# EAGLE board mainBoard(ok)2 (EAGLE 9.5.2)
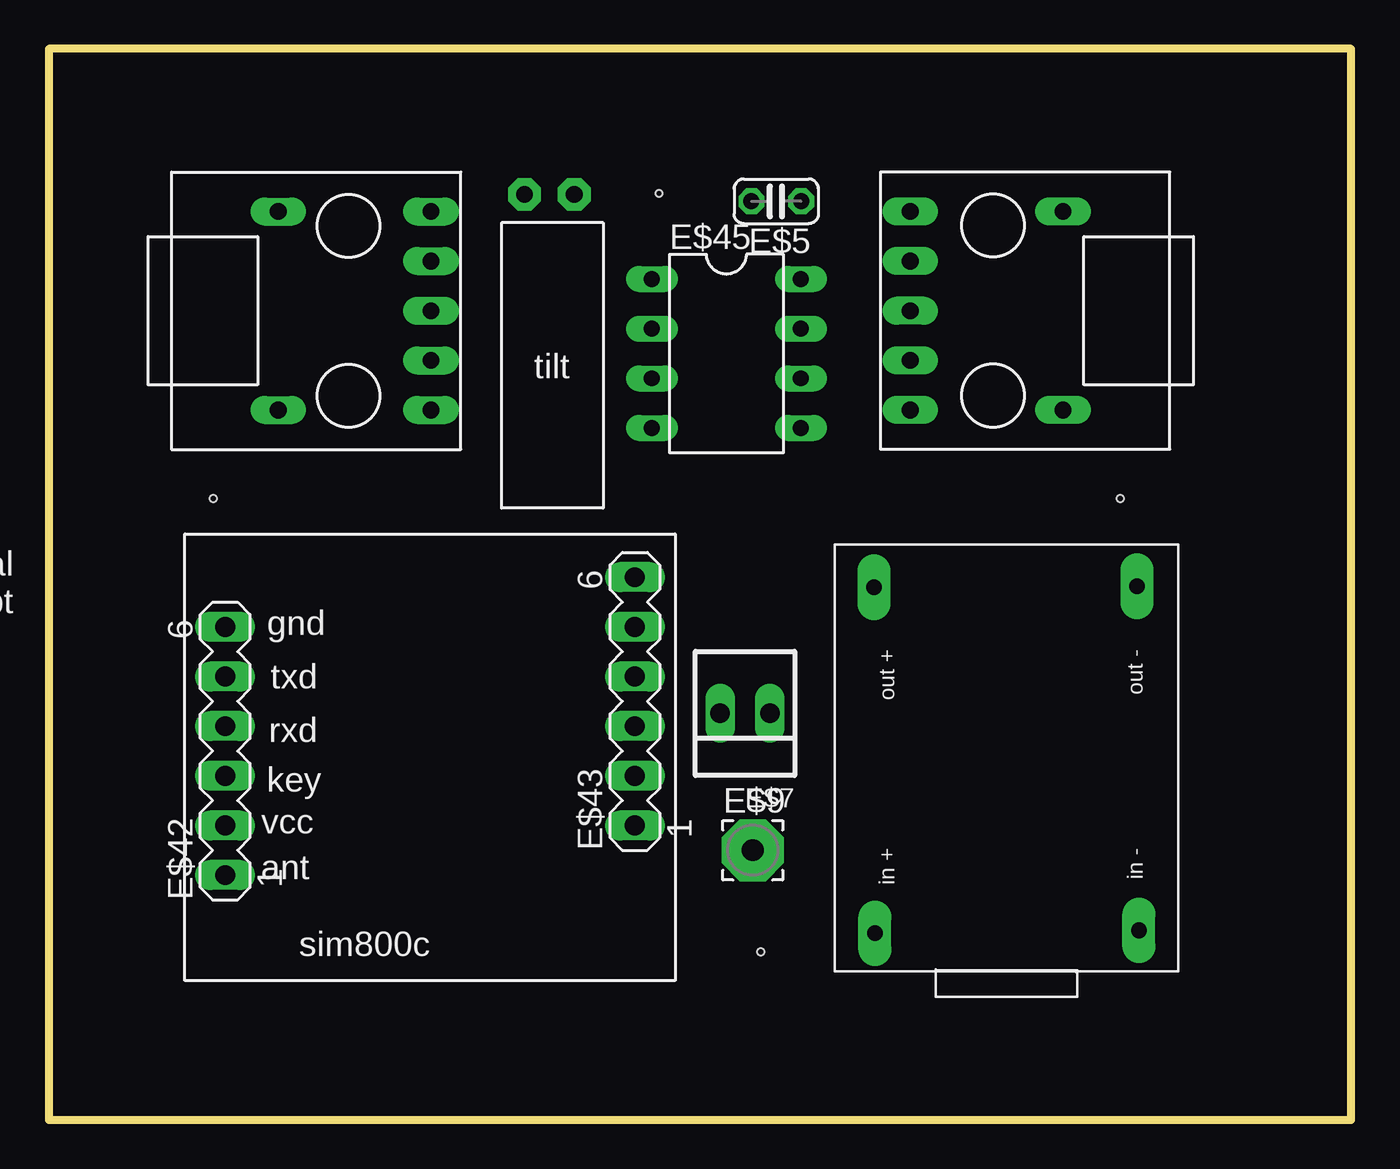
[diagram p0: board, top side]
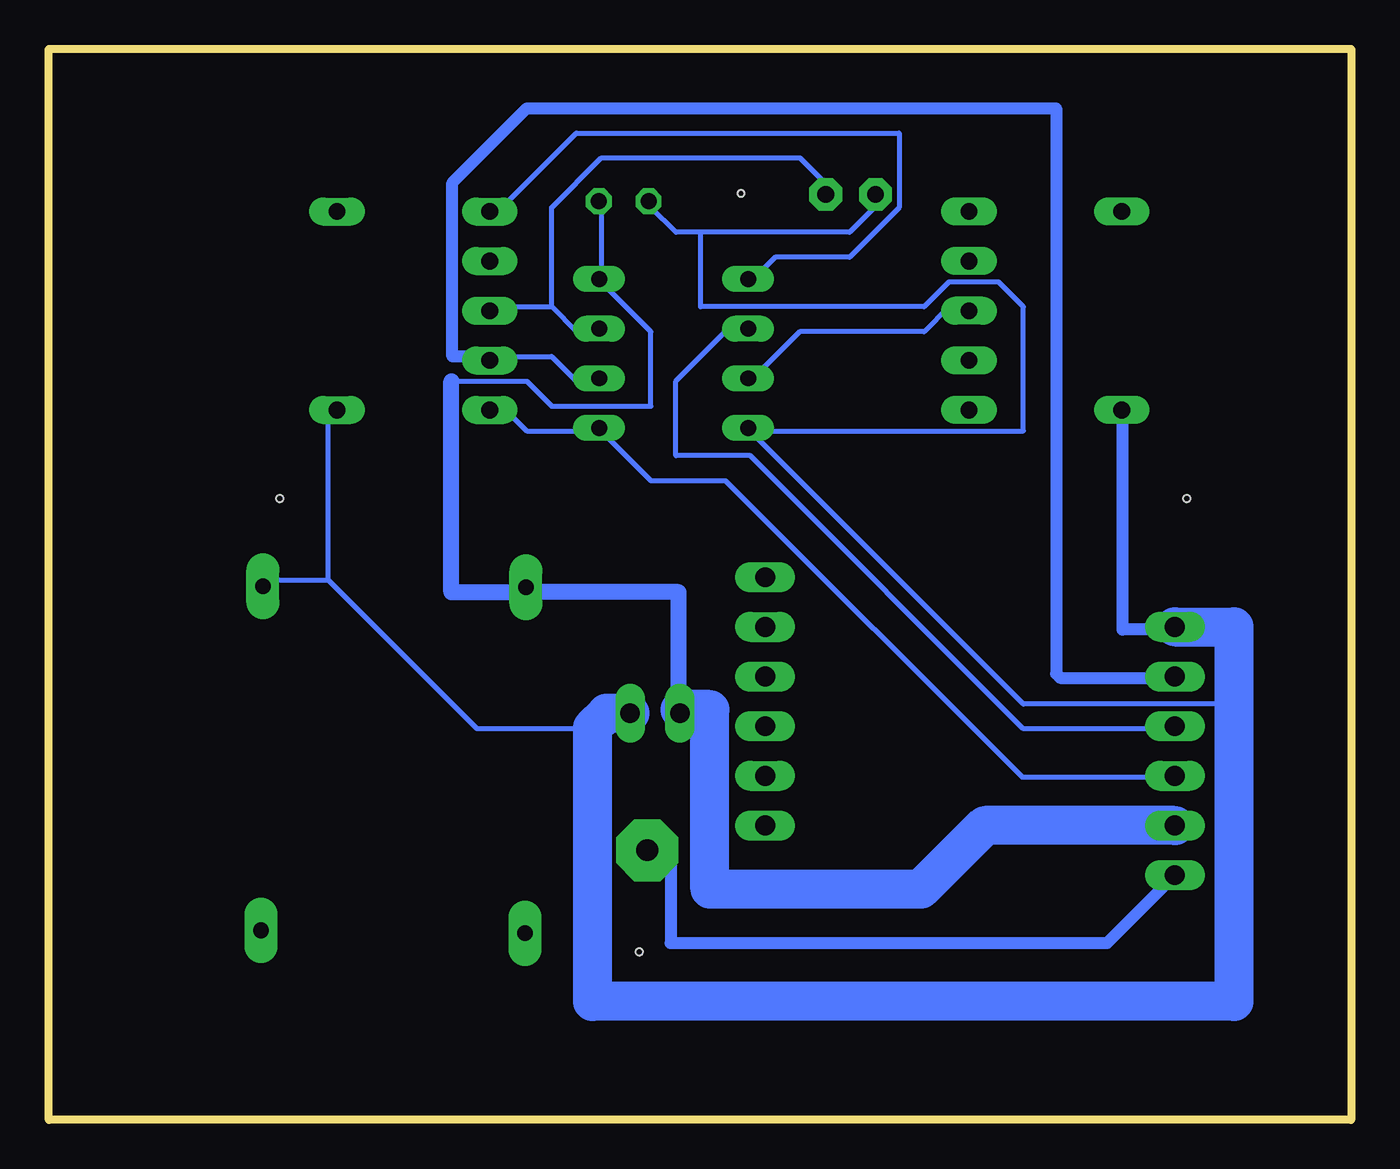
[diagram p1: board, bottom side, seen from below]

Size 66.6 x 54.8 mm. Coordinates in mm from the lower left corner, seen from the top.
Outline: 0,0 66.6,0 66.6,54.8 0,54.8 0,0
Copper layers (1*16): Top 0.035mm / dielectric 1.5mm / Bottom 0.035mm
Design rules "default *": minimum track width 10mil, minimum drill 24mil, track to track 8mil, track to pad 8mil, pad to pad 8mil, via to via 8mil, smd to smd 8mil, copper to edge 40mil, drill to drill 8mil, minimum pad ring 10mil, minimum via ring 8mil, stop-mask expansion 4mil, vias tented up to drill 0mil, thermal gap 10mil
Holes 0.35 mm at 36.4,8.6 54.8,31.8 31.2,47.4 8.4,31.8

## Footprints (pad centres in the part's own frame; a part is rotated, then mirrored left to right if it is on the bottom)
2,15/1,0 = drill 1.016 pad 2.159 octagon: 1 0,0
USB-MICRO-PCB = drill 0.85 pad 1.422 long: P$1 -5.08,6.35; P$2 -2.54,6.35; P$3 0,6.35; P$4 2.54,6.35; P$5 5.08,6.35; P$6 -5.08,-1.47; P$7 5.08,-1.47
LIPO_CHARGER = drill 0.8 pad 1.676 long: P$5 -8.3,6.85; P$6 9.3,6.95; P$7 -8.25,-6.6; P$8 9.45,-6.55
C025-024X044 = drill 0.813 octagon: 1 -1.27,0; 2 1.27,0
TILT_SENSOR = drill 0.85 pad 1.676 octagon: P$1 -6.35,-1.27; P$2 -6.35,1.27
22-23-2021 = drill 1 long: 1 -1.27,0; 2 1.27,0
3,17/1,1 = drill 1.118 pad 3.175 octagon: 1 0,0
MA06-1 = drill 1.016 long: 1 -6.35,0; 2 -3.81,0; 3 -1.27,0; 4 1.27,0; 5 3.81,0; 6 6.35,0
DIL08 = drill 0.813 long: 1 -3.81,-3.81; 2 -1.27,-3.81; 3 1.27,-3.81; 4 3.81,-3.81; 5 3.81,3.81; 6 1.27,3.81; 7 -1.27,3.81; 8 -3.81,3.81

## Placement (x,y rotation side)
E$1  [2,15/1,0]  -6.6,39.5 180 top  (outside the outline)
E$2  [USB-MICRO-PCB]  13.2,41.4 270 top
E$3  [USB-MICRO-PCB]  50.4,41.4 90 top
E$4  [LIPO_CHARGER]  48.8,19 270 top
E$5  [C025-024X044]  37.2,47 180 top
E$6  [TILT_SENSOR]  25.6,41 270 top
E$7  [22-23-2021]  35.6,20.8 180 top
E$8  [2,15/1,0]  -4.6,11.5 180 top  (outside the outline)
E$9  [3,17/1,1]  36,13.8 0 top
E$13  [2,15/1,0]  -4.6,7.3 180 top  (outside the outline)
E$42  [MA06-1]  9.01,18.88 90 top
E$43  [MA06-1]  29.97,21.42 90 top
E$45  [DIL08]  34.65,39.21 270 top

## Library data of the parts
E$1 E$8 E$9 E$13 = wirepad
E$2-E$4 E$6 = LSGPackages
E$5 = rcl
E$7 = con-molex
E$42 E$43 = con-lstb
E$45 = 74xx-us

## Nets
S$2: E$9.1 E$42.1
S$3: E$2.P$7 E$3.P$6 E$4.P$5 E$5.2 E$6.P$1 E$7.1 E$42.6 E$45.4
S$4: E$3.P$1 E$42.3 E$45.5
S$5: E$3.P$2 E$42.5 E$45.6
S$7: E$3.P$3 E$6.P$2 E$45.7
S$8: E$42.4 E$45.2
S$9: E$3.P$5 E$45.1
S$10: E$2.P$3 E$45.3
S$15: E$4.P$7 E$5.1 E$7.2 E$42.2 E$45.8

## Tracks (layer width: path | path; a pad name or v marks a point on that pad's centre or on a via)
S$2
  Bottom 0.254: 9.14,12.39 E$42.1 | 37.08,13.66 E$9.1
  Bottom 0.61: 9.14,12.39 12.48,9.05 34.8,9.05 34.8,13.4 36.8,13.4 37.08,13.66
S$3
  Bottom 0.254: 52.32,27.63 52.32,36.52 E$3.P$6 | 52.32,27.63 54.86,27.63 E$4.P$5 | 33.27,45.41 25.65,45.41 24.38,46.68 E$6.P$1 | 33.27,45.41 34.54,45.41 35.81,46.68 E$5.2 | 30.73,35.25 16.76,21.28 6,21.28 | 9.14,25.09 E$42.6 | 33.27,45.41 33.27,41.6 21.84,41.6 20.57,42.87 18.03,42.87 16.76,41.6 16.76,35.25 30.73,35.25 | 30.73,35.25 E$45.4 | 52.32,27.63 44.7,20.01 38.8,20.01
  Bottom 0.61: 9.14,25.09 11.68,25.09 11.68,36.32 E$2.P$7
  Bottom 2: E$42.6 6,25.23 6,21.28 6,6.06 38.8,6.06 38.8,20.01 38.8,20.07 38.07,20.8 E$7.1
S$4
  Bottom 0.254: E$3.P$1 43.43,36.52 42.16,35.25 39.62,35.25 E$45.5 38.35,35.25 35.81,32.71 32,32.71 16.83,17.54 9.21,17.54 9.14,17.47 E$42.3
S$5
  Bottom 0.254: E$45.6 39.62,37.79 40.89,39.06 43.43,39.06 E$3.P$2 | 9.21,22.62 9.14,22.55 E$42.5
  Bottom 0.61: 9.21,22.62 14.88,22.62 15.09,22.83 15.09,51.76 42.16,51.76 45.97,47.95 45.97,39.06 44.7,39.06 E$3.P$2
S$7
  Bottom 0.254: 40.89,41.6 39.62,40.33 E$45.7 | 40.89,41.6 43.43,41.6 E$3.P$3 | 40.89,41.6 40.89,46.68 38.35,49.22 28.19,49.22 26.92,47.95 E$6.P$2
S$8
  Bottom 0.254: E$45.2 32,40.33 34.54,37.79 34.54,33.98 30.73,33.98 16.76,20.01 9.14,20.01 E$42.4
S$9
  Bottom 0.254: E$45.1 30.73,42.87 29.46,44.14 25.65,44.14 23.11,46.68 23.11,50.49 39.62,50.49 43.43,46.68 E$3.P$5
S$10
  Bottom 0.254: E$45.3 30.73,37.79 28.19,40.33 21.84,40.33 20.57,41.6 E$2.P$3
S$15
  Bottom 0.254: 34.33,21 E$7.2 | 38.35,42.87 38.35,46.68 E$5.1 | 38.35,42.87 35.81,40.33 35.81,36.52 40.89,36.52 42.16,37.79 46.02,37.79 | 38.35,42.87 E$45.8
  Bottom 0.813: E$7.2 34.4,20.96 34.4,27 42.19,27 E$4.P$7 42.45,27 46.02,27 46.02,37.79
  Bottom 2: E$42.2 18.73,15.07 22,11.8 32.8,11.8 32.8,21 34.33,21

## Text on the board
tPlace: switch tilt or external / interrupt | gnd | txd | rxd | switch on off | key | vcc | ant | sim800c